# Altium PCB PCB1.PcbDoc (part 2 of 3)
Units mm, origin at the board's own origin, x right, y up, seen from the top; angles counter-clockwise.
Board outline 176 x 144.01 mm, 2 copper layers (Top Layer, Bottom Layer); 148 components, 189 nets, 767 pads, 256 vias.
Unrouted connection lines stored in the file: 30.
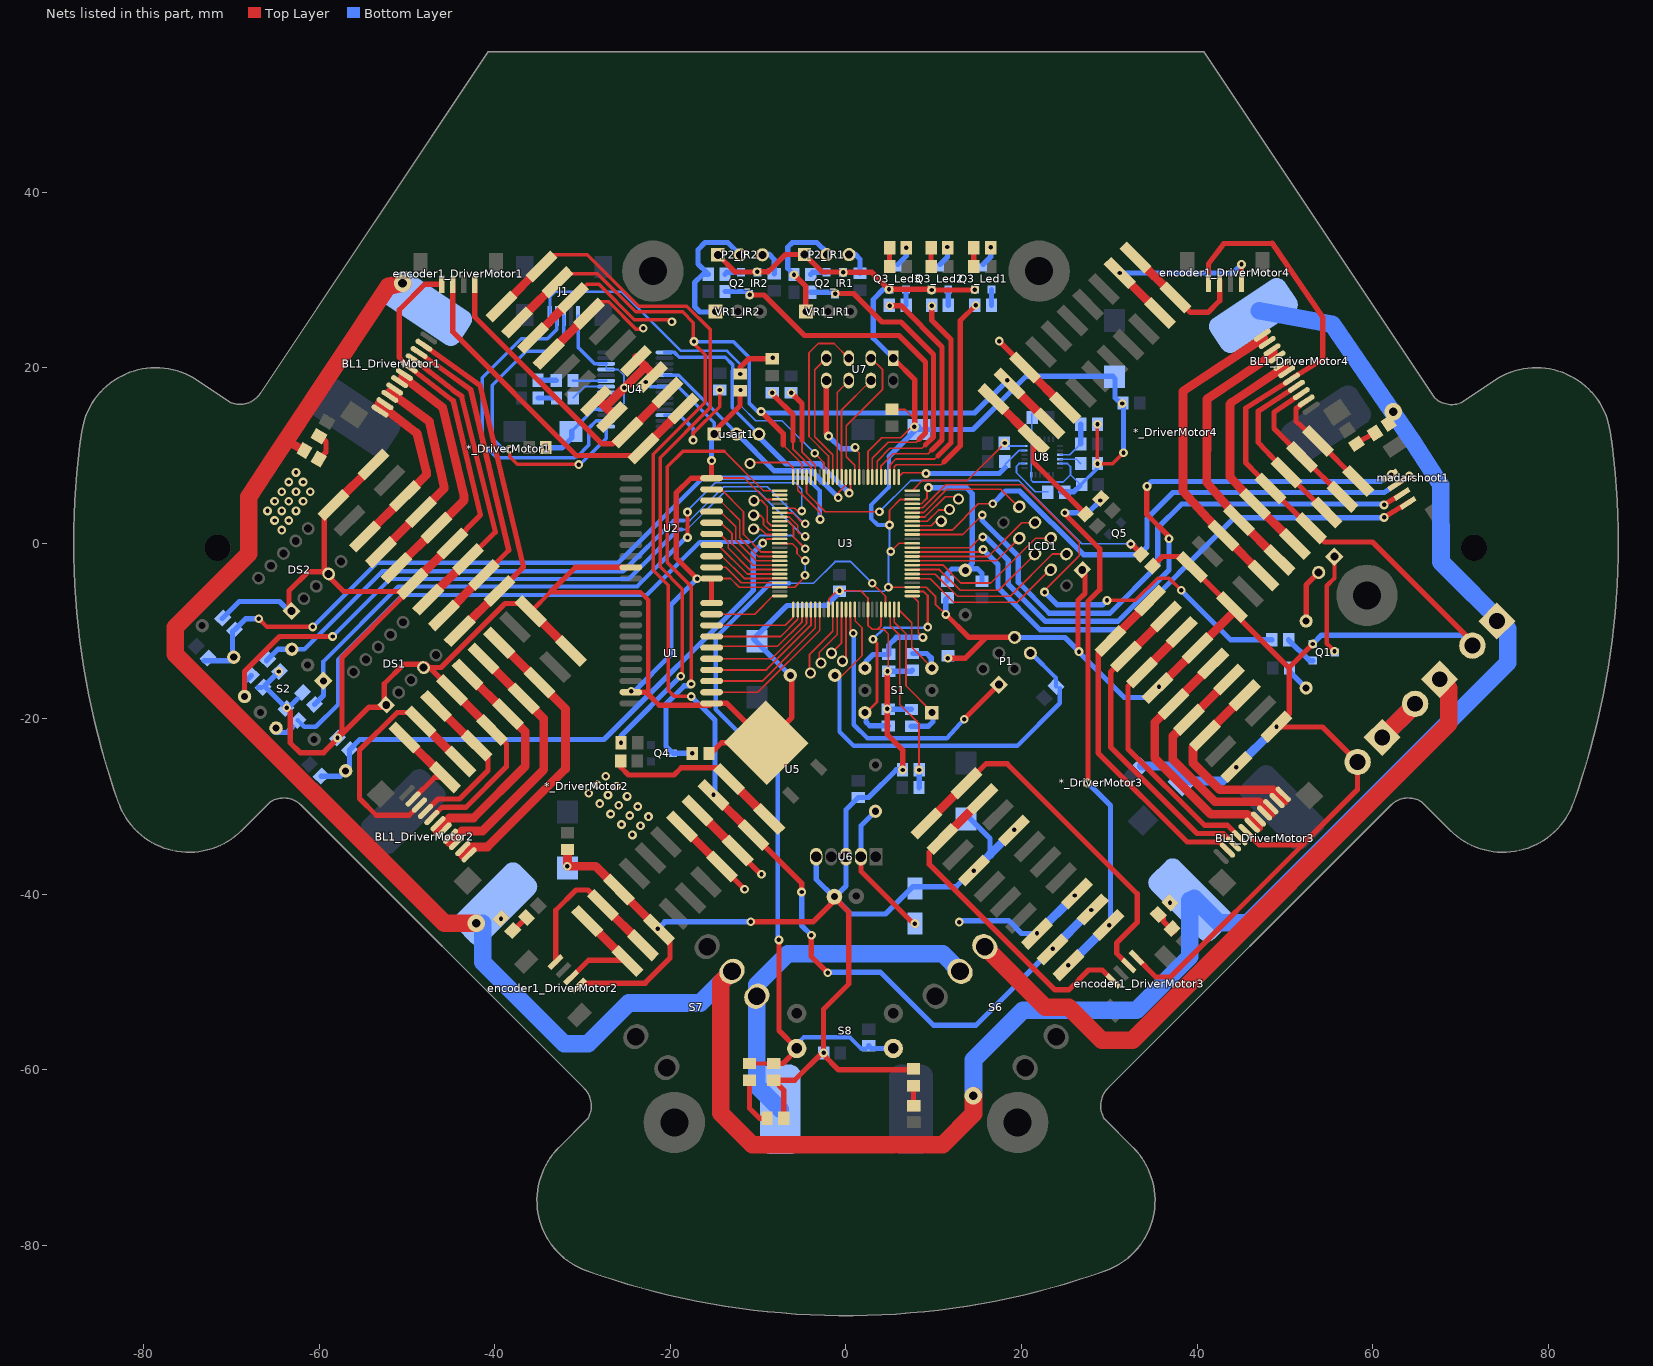
[diagram p2: the nets of this part, all layers, seen from the top]

## Via types
v1: diameter 1, hole 0.5, Top Layer to Bottom Layer, 225 vias
v2: diameter 2, hole 1, Top Layer to Bottom Layer, 17 vias
v3: diameter 1.27, hole 0.8, Top Layer to Bottom Layer, 12 vias
v4: diameter 1, hole 0.5, Top Layer to Bottom Layer, tented top, 1 vias
v5: diameter 1.27, hole 0.711, Top Layer to Bottom Layer, 1 vias

## Nets (pads, with @x,y where several pads share a name; then routed paths per layer and width w, separated by ;. In a path a pad name is that pad's centre, name@x,y a point inside that pad or via, vN(x,y) a via of type N, cw(c..) or ccw(c..) an arc to the next point about the centre after c; other vN are vias at no path point) (continued)
ADD0_DriverMotor1: *_DriverMotor1.7 *_DriverMotor1.8 *_DriverMotor1.11 *_DriverMotor1.16 *_DriverMotor2.8 *_DriverMotor2.11 *_DriverMotor2.16 *_DriverMotor3.7 *_DriverMotor3.11 *_DriverMotor3.16 *_DriverMotor4.11 *_DriverMotor4.16 Battery2.2 BL1_DriverMotor1.7 BL1_DriverMotor2.7 BL1_DriverMotor3.7 BL1_DriverMotor4.7 C4.1 C5.1 C6.2 C7.1 C8.2 C10.1 C11.1 C12.2 C13.1 C14.2 C15.2 C16.2 C17.2 C18.1 C19.1 C20.1 C21.2 C22.1 C23.1 C24.1 C25.2 C27.1 D6.1 D7.2 DS1.1 DS1.4 DS2.1 DS2.4 encoder1_DriverMotor1.1 encoder1_DriverMotor2.1 encoder1_DriverMotor3.1 encoder1_DriverMotor4.1 J1.5 kick1.2 LCD1.1 P1.6 P2_IR1.1 P2_IR2.1 Q1.3 Q2_IR1.3 Q2_IR2.3 Q3_Led1.3 Q3_Led2.3 Q3_Led3.3 R3.1 R4.1 R5.1 R6.1 R7.1 R8.1 R9.1 R10.1 R11.2 R12.2 R13.2 R17.1 R26.1 R28.1 R32.2 R35.1 R36.1 Reset1.1 U1.1 U1.10 U1.19 U2.1 U2.10 U2.19 U3.3 U3.13 U3.23 U3.33 U3.43 U3.53 U3.63 U3.73 U3.84 U3.93 U3.96 U4.7 U4.18 U4.21 U4.25 U4.26 U5.4 U6.3 U6.5 U7.1 U8.1 U8.11 U8.18 usart1.1 | length 1032.2
  Top Layer w0.2: U2.1@-15.314,-4.013 -13.157,-4.013 -12.17,-5 U3.73@-7.55,-5 -5.852,-5 v1@-4.674,-3.822 ; U2.10@-15.291,7.44 -11.605,7.44 -9.166,5 U3.53@-7.55,5 ; U3.63@-7.55,0 -7.5,-0.05 -6.097,-0.05 -5.588,-0.559 -5.588,-1.168 v1@-4.775,-1.981 ; v1(-4.674,-3.632) v1@-4.674,-3.531 ; v1@-3.581,10.236 v1(-3.569,10.249) -2.5,9.18 U3.43@-2.5,7.55 ; U3.84@-2,-7.55 -1.95,-7.5 -1.95,-6.35 -1.01,-5.41 v1(-0.737,-5.41) 1.676,-5.41 2.5,-6.234 U3.93@2.5,-7.55 2.5,-9.333 2.972,-9.804 3.581,-9.804 ; U3.33@2.5,7.55 2.5,10.45 4.064,12.014 6.223,12.014 7.849,13.64 7.849,14.122 6.721,15.25 C19.1@5.232,15.25 ; U3.96@4,-7.55 4,-9.386 3.581,-9.804 ; v1@4.826,-14.58 4.826,-10.338 4.293,-9.804 3.581,-9.804 ; v1(4.83,-5) U3.3@7.55,-5 9.14,-5 10.185,-6.045 10.185,-6.934 v1(11.354,-8.103) ; v1(4.953,2.083) 4.953,3.759 6.194,5 U3.23@7.55,5 ; v1(5.105,-0.94) 6.045,0 U3.13@7.55,0
  Top Layer w0.4: v1(28.653,13.555) v1(28.653,9.085) 30.395,9.085 v1@31.62,10.309
  Top Layer w0.5: *_DriverMotor2.11@-35.857,-7.757 -33.662,-5.563 -23.419,-5.563 -22.517,-6.464 -22.517,-17.209
  Top Layer w0.6: v1(-63.729,-18.745) -63.322,-19.152 -63.322,-22.733 -62.205,-23.851 -59.512,-23.851 -54.331,-18.669 -52.603,-18.669 -52.603,-16.002 -50.396,-13.795 DS1.4@-47.927,-13.795 ; DS2.1@-63.159,-7.623 -63.449,-7.333 -63.449,-5.41 -61.29,-3.251 DS2.4@-59.452,-3.251 ; *_DriverMotor1.11@-58.359,4.384 -58.359,4.226 -59.452,3.133 -59.452,-2.972 DS2.4@-58.942,-3.482 -58.942,-3.762 -57.22,-5.484 -50.267,-5.484 -50.267,-5.838 -57.429,-13.001 -57.429,-21.438 v1@-58.166,-22.174 ; *_DriverMotor1.11@-53.815,8.928 *_DriverMotor1.11@-53.815,8.971 ; BL1_DriverMotor1.7@-49.817,20.158 -50.902,21.184 -50.902,26.594 -47.969,29.526 encoder1_DriverMotor1.1@-46.046,29.526 ; BL1_DriverMotor1.7@-49.757,20.073 -44.771,16.209 ; DS1.4@-48.134,-14.163 -47.455,-14.163 *_DriverMotor2.16@-44.895,-16.722 ; DS1.4@-47.805,-13.795 -47.452,-14.148 -46.126,-14.148 -38.837,-6.858 -36.799,-6.858 -35.9,-7.757 *_DriverMotor2.11@-35.857,-7.757 ; BL1_DriverMotor2.7@-47.192,-31.249 -46.017,-30.074 -43.307,-30.074 -38.684,-25.451 -38.684,-22.89 *_DriverMotor2.16@-40.308,-21.266 ; *_DriverMotor1.16@-44.85,-0.024 -41.642,3.213 -44.755,16.231 ; *_DriverMotor1.16@-44.835,-0.052 *_DriverMotor1.16@-44.835,-0.009 ; -33.662,-5.563 -30.843,-2.743 U2.19@-24.514,-2.743 ; encoder1_DriverMotor2.1@-30.423,-50.372 -30.165,-50.114 -22.885,-50.114 -20.041,-47.269 -20.041,-45.302 -21.313,-44.03 *_DriverMotor2.8@-21.313,-44.004 ; U1.19@-24.514,-16.967 -22.758,-16.967 -22.517,-17.209 -21.276,-18.45 -15.526,-18.45 U1.1@-15.314,-18.237 -13.564,-18.237 U5.4@-9.055,-22.72 ; v1(-16.967,-4.039) -19.355,-1.651 -19.355,5.715 -17.653,7.417 U2.10@-15.314,7.417 -15.314,9.421 v1(-15.316,9.423) ; R36.1@-15.57,-24.105 -14.186,-22.72 U5.4@-9.055,-22.72 ; U1.10@-15.314,-6.807 U2.1@-15.314,-4.013 ; usart1.1@-15.291,12.446 -12.065,15.672 -12.065,16.754 C7.1@-11.684,17.135 ; P2_IR2.1@-14.605,32.868 -12.604,30.866 v1(-10.124,30.943) -8.834,30.943 -6.883,32.893 P2_IR1.1@-4.724,32.893 -2.749,30.943 v1(-0.32,30.866) 2.966,30.866 v1(4.902,28.931) 9.677,28.931 v1(9.754,28.854) 14.63,28.854 v1(14.681,28.905) ; v1(-10.846,-43.129) -10.846,-43.231 -10.795,-43.282 -10.643,-43.129 -3.759,-43.129 -1.321,-40.691 -1.321,-40.361 0.32,-42.001 0.32,-50.201 -2.565,-53.086 -2.565,-58.268 -0.838,-59.995 7.493,-59.995 R26.1@7.696,-59.792 ; D7.2@-7.102,-65.507 -7.102,-62.301 R35.1@-8.23,-61.173 -5.852,-61.173 v1@-2.565,-57.887 ; Reset1.1@-6.172,-15.088 -6.172,-19.837 U5.4@-9.055,-22.72 ; v1@4.826,-14.58 4.699,-14.707 v1(4.699,-18.872) 4.699,-21.793 6.452,-23.546 v1(6.452,-25.832) ; U7.1@5.385,21.082 7.849,18.618 7.849,13.64 v1@7.849,13.462 ; v1@11.367,-8.09 13.97,-10.693 15.999,-10.693 13.605,-13.087 v1(11.608,-13.087) ; 15.746,-10.717 P1.6@19.11,-10.717 ; v1(26.543,-12.344) 26.441,-12.243 26.441,-6.486 27.224,-5.703 LCD1.1@27.224,-3.455 ; v1(28.653,13.555) v1@28.661,13.564 ; encoder1_DriverMotor3.1@33.1,-47.213 35.291,-49.403 36.982,-49.403 52.045,-34.341 47.074,-34.341 BL1_DriverMotor3.7@45.574,-32.841 ; R17.1@34.991,-2.548 36.04,-1.499 38.178,-1.499 43.934,-7.254 43.977,-7.254 *_DriverMotor4.11@43.977,-7.706 ; encoder1_DriverMotor4.1@41.305,29.653 41.3,31.852 42.697,33.655 43.053,34.163 48.565,34.188 54.331,25.756 54.331,20.98 BL1_DriverMotor4.7@50.822,18.797 ; *_DriverMotor4.11@44.143,-7.872 50.462,-14.191 ; *_DriverMotor3.11@49.012,-20.92 50.495,-19.437 50.495,-14.158 v1(53.182,-11.471) ; *_DriverMotor3.11@49.047,-20.92 54.289,-20.92 Battery2.2@58.29,-24.92 58.29,-28.07 52.032,-34.328 ; BL1_DriverMotor4.7@50.764,18.713 45.542,15.392 45.542,9.22 48.37,6.27 52.914,1.726 52.957,1.726 54.531,0.152 59.969,0.152 71.371,-11.249 kick1.2@71.371,-11.662
  Top Layer w1: *_DriverMotor1.11@-58.359,4.384 *_DriverMotor1.11@-53.815,8.928 ; *_DriverMotor1.16@-50.267,-5.484 *_DriverMotor1.16@-44.835,-0.052 ; *_DriverMotor2.16@-44.895,-16.722 -44.852,-16.722 *_DriverMotor2.16@-40.308,-21.266 ; *_DriverMotor2.11@-35.857,-7.757 *_DriverMotor2.11@-31.313,-12.301 ; C20.1@-31.725,-34.884 -31.725,-36.779 v1(-31.75,-36.804) -28.513,-36.804 *_DriverMotor2.8@-25.885,-39.433 ; *_DriverMotor1.7@-28.136,16.289 -27.412,15.565 ; *_DriverMotor1.8@-26.668,14.821 -27.412,15.565 ; *_DriverMotor2.8@-25.87,-39.448 *_DriverMotor2.8@-21.313,-44.004 ; *_DriverMotor1.7@-23.895,21.187 -22.906,20.198 ; *_DriverMotor1.8@-22.099,19.391 -22.906,20.198 ; *_DriverMotor3.16@35.488,-16.527 *_DriverMotor4.11@44.143,-7.872 ; -27.412,15.565 -22.906,20.071 -22.906,20.198
  Bottom Layer w0.2: U4.18@-27.328,15.251 -25.973,15.251 -25.298,15.926 -25.298,19.126 -25.973,19.801 U4.25@-27.328,19.801 U4.26@-27.328,20.451 ; U4.21@-27.328,17.201 -25.903,17.201 v1@-25.298,17.805 ; v1@-25.298,17.78 -25.349,17.729 v1(-25.248,17.729) ; v1(-12.014,17.465) -12.014,15.697 -10.287,13.97 -7.29,13.97 v1(-3.569,10.249) ; v1(-4.674,-3.632) -4.648,-3.607 v1(-4.648,-1.956) ; C4.1@-0.737,-5.471 4.359,-5.471 v1(4.83,-5) 4.83,-1.215 v1(5.105,-0.94) 4.953,-0.787 v1(4.953,2.083) ; C15.2@21.19,14.71 21.177,14.697 21.177,11.93 U8.1@21.102,11.855 U8.18@21.102,7.805 21.102,7.193 21.311,6.985 24.742,6.985 25.578,7.821 ; U8.11@24.377,9.08 25.236,9.08 25.578,8.738 25.578,7.821 ; C27.1@26.753,6.646 25.578,7.821
  Bottom Layer w0.4: C6.2@-31.242,12.751 -28.742,15.251 U4.18@-27.328,15.251 ; J1.5@-30.531,25.895 -30.531,22.327 -28.655,20.451 U4.26@-27.328,20.451 ; v1(-22.822,18.377) -22.296,17.851 U4.7@-20.678,17.851 -19.121,17.851 -15.011,13.741 usart1.1@-15.011,12.446 ; C27.1@26.753,6.646 26.753,6.661 28.653,8.561 v1(28.653,9.085)
  Bottom Layer w0.5: 4.902,9.881 4.902,6.4 2.86,4.359 2.86,2.83 3.607,2.083 v1(4.953,2.083)
  Bottom Layer w0.6: R13.2@-71.068,-8.561 -69.136,-6.629 -64.559,-6.629 DS2.1@-63.312,-7.877 ; R8.1@-66.968,-16.42 R8.1@-66.613,-16.42 ; R8.1@-66.23,-16.319 -63.664,-18.886 -62.521,-17.743 ; R8.1@-66.204,-16.217 R9.1@-64.821,-14.834 ; v1@-34.138,10.871 -32.36,10.871 -31.242,11.988 C6.2@-31.242,12.751 ; v1(-24.46,-16.866) -24.13,-16.866 -19.964,-12.7 -19.964,-7.036 v1(-16.967,-4.039) ; v1(-21.427,-43.916) -20.641,-43.129 v1(-10.846,-43.129) ; v1(-15.316,9.423) -15.316,12.141 usart1.1@-15.011,12.446 ; Reset1.1@-6.071,-15.367 -10.541,-10.897 -6.731,-7.087 -2.21,-7.087 C4.1@-0.838,-5.715 ; U6.5@-3.4,-35.712 -3.4,-38.281 C8.2@-1.321,-40.361 ; R6.1@4.806,-18.915 7.428,-18.915 R3.1@7.446,-18.933 ; R4.1@4.878,-14.565 7.464,-14.565 R5.1@7.572,-14.457 ; 4.902,9.881 C14.2@8.331,13.31 ; Q3_Led3.3@4.948,28.914 4.225,28.914 3.099,27.788 3.099,23.368 U7.1@5.385,21.082 ; R28.1@6.441,-25.806 5.74,-25.806 2.581,-28.966 C18.1@1.397,-28.966 0,-30.363 U6.3@0,-35.712 0,-39.04 C8.2@-1.321,-40.361 ; C14.2@8.331,12.954 14.453,12.954 20.523,19.025 30.378,19.025 30.658,18.745 30.658,16.586 31.623,15.621 v1(31.623,10.312) ; v1(11.354,-8.103) 11.354,-6.402 R11.2@11.549,-6.207 ; C17.2@14.021,-31.242 16.408,-33.629 16.408,-35.458 ; v1(14.554,-37.313) 14.376,-37.313 12.566,-39.123 7.613,-39.123 4.496,-42.24 0.559,-42.24 C8.2@-1.321,-40.361 ; v1@19.177,-32.69 v1(19.177,-32.639) ; P1.6@19.364,-10.92 19.54,-10.744 24.943,-10.744 v1(26.543,-12.344) ; C22.1@24.436,5.884 25.991,5.884 C27.1@26.634,6.528 ; v1@26.467,-12.344 31.699,-17.577 34.417,-17.577 v1(35.662,-16.332) ; v1@49.047,-20.955 v1(49.047,-20.904) ; v1(53.182,-11.471) 54.188,-10.465 70.174,-10.465 kick1.2@71.371,-11.662
  Bottom Layer w1: v1(14.554,-37.313) 16.408,-35.458 v1@19.177,-32.69 ; C11.1@33.641,-25.363 36.671,-25.363 C12.2@38.382,-27.074 42.928,-27.074 v1(44.475,-25.527) v1@49.047,-20.955
  other v1: -2.55,-58.064 -24.333,-33.222 -23.418,-32.181 -25.578,-32.035 -22.503,-31.141 -24.65,-31.013 -26.822,-30.848 -23.723,-29.991 -25.883,-29.845 -28.067,-29.661 -24.943,-28.842 -27.115,-28.677 -29.312,-28.474 -26.163,-27.693 -28.347,-27.509 -27.383,-26.543 -57.937,-22.174 -64.618,-14.605 4.724,-14.58 -64.289,1.499 -65.101,2.595 -63.477,2.595 -65.913,3.691 -64.289,3.691 -62.665,3.691 -65.101,4.788 -63.477,4.788 -61.853,4.788 -64.289,5.884 -62.665,5.884 -61.042,5.884 -63.477,6.981 -61.853,6.981 -62.665,8.077 -34.204,10.897 7.798,13.259 31.471,15.926
BATTERY: F1_DriverMotor1.2 F1_DriverMotor2.2 F1_DriverMotor3.2 F1_DriverMotor4.2 kick1.1 R18_DriverMotor1.1 R18_DriverMotor2.1 R18_DriverMotor3.1 R18_DriverMotor4.1 S7.2 | length 336.7
  Top Layer w0.6: -65.133,9.699 -63.917,10.914
  Top Layer w1: -63.774,11.748 R18_DriverMotor1.1@-61.707,10.559
  Top Layer w2: v2(-50.521,29.616) -52.153,29.285 -63.774,11.748 -65.133,9.699 -68.055,5.288 -68.055,-1.203 -76.403,-9.55 -76.403,-12.624 -45.745,-43.282 v2(-42.139,-43.282) ; S7.2@-12.987,-48.775 -14.249,-50.038 -14.249,-64.948 -10.693,-68.504 11.024,-68.504 14.529,-64.999 v2@14.529,-62.941
  Bottom Layer w2: F1_DriverMotor2.2@-41.377,-43.282 -41.377,-47.734 -32.109,-57.001 -29.391,-57.001 -24.765,-52.375 -16.586,-52.375 S7.2@-12.987,-48.775 ; v2(14.503,-62.941) 14.529,-62.916 14.529,-58.826 20.168,-53.188 33.096,-53.188 39.186,-47.098 F1_DriverMotor3.2@39.186,-40.646 ; F1_DriverMotor3.2@39.669,-40.443 42.457,-43.231 45.796,-43.231 75.413,-13.614 75.413,-9.754 67.793,-2.134 67.755,6.656 64.574,11.608 55.41,24.948 F1_DriverMotor4.2@47.083,26.493
  other v1: -39.305,-42.762 36.918,-40.959
  other v2: 62.357,14.986
BUZ: R1.1 U3.21 | length 60.8
  Top Layer w0.2: U3.21@7.55,4 7.6,4.05 8.724,4.05 11.354,6.68 20.015,6.68 26.568,0.127 26.568,-1.422 22.631,-5.359 v1(22.631,-5.563)
  Top Layer w0.4: v1(29.743,-6.502) 32.969,-6.502 35.509,-3.962 36.805,-3.962 v1(38.202,-5.359)
  Bottom Layer w0.6: v1(22.631,-5.563) 24.079,-7.01 29.235,-7.01 v1(29.743,-6.502) ; v1(38.202,-5.359) 43.84,-10.998 R1.1@48.529,-10.998
CE: U3.36 U7.3 | length 16.2
  Top Layer w0.2: U3.36@1,7.55 1,8.881 0.025,9.855 0.025,13.411 4.166,17.551 4.166,19.761 U7.3@2.845,21.082
CSN: U3.39 U7.4 | length 12.4
  Top Layer w0.2: U3.39@-0.5,7.55 -0.5,15.197 U7.4@2.845,18.542
DISCHARGE: madarshoot1.4 U3.11 | length 67.8
  Top Layer w0.2: U3.11@7.55,-1 15.332,-1 v1(15.621,-0.711)
  Top Layer w0.6: v1@61.433,3.003 madarshoot1.4@64.218,4.72
  Bottom Layer w0.6: v1(15.621,-0.711) 17.316,-2.406 17.316,-5.048 22.123,-9.855 31.496,-9.855 44.272,2.921 v1@61.305,2.921
  other v1: 61.305,2.946
DM: J1.2 U4.16 | length 37.4
  Bottom Layer w0.4: J1.2@-32.931,25.895 -32.931,24.371 -34.011,23.292 -36.982,23.292 -41.427,18.847 -41.427,11.405 -39.776,9.754 -30.94,9.754 -30.827,9.866 -30.621,9.866 -29.337,11.151 -29.337,13.081 -28.467,13.951 U4.16@-27.328,13.951
DP: J1.3 U4.15 | length 36.7
  Top Layer w0.4: v1(-38.329,10.719) -38.329,9.855 -37.465,8.992 -30.48,8.992 v1@-30.251,8.763 ; v1(-30.455,8.966) -30.455,8.915 -30.429,8.89 v1@-30.378,8.89
  Bottom Layer w0.4: v1(-38.329,10.719) -38.329,10.668 -38.989,10.668 -40.31,11.989 -40.31,18.009 -36.449,21.869 -33.985,21.869 -32.131,23.724 J1.3@-32.131,25.895 ; v1(-30.455,8.966) -30.455,8.915 -30.429,8.89 -30.378,8.89 -27.328,11.94 U4.15@-27.328,13.301
ENC1_DriverMotor1: *_DriverMotor1.10 encoder1_DriverMotor1.2 | length 40
  Top Layer w0.6: encoder1_DriverMotor1.2@-44.796,29.526 -44.796,24.069 -30.734,10.008 *_DriverMotor1.10@-24.603,10.008 ; *_DriverMotor1.10@-24.45,9.855 *_DriverMotor1.10@-24.603,10.008 ; *_DriverMotor1.10@-23.076,10.823 -23.891,10.008 *_DriverMotor1.10@-24.603,10.008
  Top Layer w1: *_DriverMotor1.10@-23.076,10.823 *_DriverMotor1.10@-18.507,15.392
ENC1_DriverMotor2: *_DriverMotor2.10 encoder1_DriverMotor2.2 | length 13.4
  Top Layer w0.6: encoder1_DriverMotor2.2@-31.307,-49.489 -29.326,-47.508 -25.019,-47.508 *_DriverMotor2.10@-25.019,-47.482
  Top Layer w1: *_DriverMotor2.10@-29.462,-43.04 *_DriverMotor2.10@-25.019,-47.482
ENC1_DriverMotor3: *_DriverMotor3.10 encoder1_DriverMotor3.2 | length 42.7
  Top Layer w0.6: *_DriverMotor3.10@13.729,-27.358 15.967,-25.121 18.364,-25.121 33.172,-39.929 33.172,-43.205 30.836,-45.542 30.836,-46.716 encoder1_DriverMotor3.2@32.217,-48.097
  Top Layer w1: *_DriverMotor3.10@9.16,-31.927 *_DriverMotor3.10@13.729,-27.358
ENC1_DriverMotor4: *_DriverMotor4.10 encoder1_DriverMotor4.2 | length 15
  Top Layer w0.6: *_DriverMotor4.10@37.539,28.029 39.253,26.314 41.25,26.314 42.57,27.635 encoder1_DriverMotor4.2@42.57,29.921
  Top Layer w1: *_DriverMotor4.10@32.97,32.598 *_DriverMotor4.10@37.539,28.029
ENC2_DriverMotor1: *_DriverMotor1.9 encoder1_DriverMotor1.4 | length 34.3
  Top Layer w0.6: encoder1_DriverMotor1.4@-42.296,29.526 -42.296,25.786 -27.864,11.354 -26.544,11.354 *_DriverMotor1.9@-24.872,13.025
  Top Layer w1: *_DriverMotor1.9@-24.872,12.619 *_DriverMotor1.9@-20.303,17.188
ENC2_DriverMotor2: *_DriverMotor2.9 encoder1_DriverMotor2.4 | length 19.3
  Top Layer w0.6: encoder1_DriverMotor2.4@-33.075,-47.721 -33.075,-41.813 -30.759,-39.497 -29.413,-39.497 *_DriverMotor2.9@-27.681,-41.229
  Top Layer w1: *_DriverMotor2.9@-27.681,-41.229 -23.223,-45.686 *_DriverMotor2.9@-23.223,-45.712
ENC2_DriverMotor3: *_DriverMotor3.9 encoder1_DriverMotor3.4 | length 38.2
  Top Layer w0.6: *_DriverMotor3.9@10.956,-33.723 9.5,-35.18 9.5,-36.576 23.8,-50.876 25.375,-50.876 27.635,-48.616 29.2,-48.616 encoder1_DriverMotor3.4@30.449,-49.865
  Top Layer w1: *_DriverMotor3.9@10.956,-33.723 *_DriverMotor3.9@15.525,-29.154
ENC2_DriverMotor4: *_DriverMotor4.9 encoder1_DriverMotor4.4 | length 22.9
  Top Layer w0.6: encoder1_DriverMotor4.4@45.055,29.653 45.055,31.684 45.036,31.702 45.06,31.726 v1(45.06,31.775)
  Top Layer w1: v1(31.174,30.802) *_DriverMotor4.9@35.743,26.233
  Bottom Layer w0.6: v1(31.174,30.802) 44.086,30.802 v1(45.06,31.775)
HALL1_DriverMotor1: *_DriverMotor1.18 BL1_DriverMotor1.9 | length 36.5
  Top Layer w0.6: BL1_DriverMotor1.9@-48.647,21.737 -42.749,17.504 ; -42.757,17.493 -38.43,-0.788 -41.698,-4.056 *_DriverMotor1.18@-41.698,-4.099
  Top Layer w1: *_DriverMotor1.18@-45.787,-8.188 *_DriverMotor1.18@-41.698,-4.099
HALL1_DriverMotor2: *_DriverMotor2.18 BL1_DriverMotor2.9 | length 29.1
  Top Layer w0.5: -49.759,-30.988 BL1_DriverMotor2.9@-48.606,-29.835
  Top Layer w0.6: -49.759,-30.988 -53.518,-30.988 -55.423,-29.083 -55.423,-23.571 -51.13,-19.279 *_DriverMotor2.18@-49.549,-19.279 ; *_DriverMotor2.18@-44.055,-24.772 *_DriverMotor2.18@-44.012,-24.772
  Top Layer w1: *_DriverMotor2.18@-49.549,-19.279 *_DriverMotor2.18@-44.055,-24.772
HALL1_DriverMotor3: *_DriverMotor3.18 BL1_DriverMotor3.9 | length 36.1
  Top Layer w0.6: *_DriverMotor3.18@31.896,-12.935 30.15,-14.68 30.15,-23.216 40.005,-33.071 42.976,-33.071 BL1_DriverMotor3.9@44.16,-34.255 ; *_DriverMotor3.18@36.44,-8.391 *_DriverMotor3.18@36.44,-8.347
  Top Layer w1: *_DriverMotor3.18@31.896,-12.935 *_DriverMotor3.18@36.44,-8.391
HALL1_DriverMotor4: *_DriverMotor4.18 BL1_DriverMotor4.9 | length 16.6
  Top Layer w0.6: BL1_DriverMotor4.9@51.874,17.049 48.754,14.949 48.754,13.07 51.962,9.862 52.006,9.862 *_DriverMotor4.18@56.55,5.318
HALL2_DriverMotor1: *_DriverMotor1.17 BL1_DriverMotor1.8 | length 33.6
  Top Layer w0.6: BL1_DriverMotor1.8@-49.202,20.905 -44.681,17.401 -44.679,17.399 ; -44.698,17.379 -43.79,16.739 -39.954,1.27 -40.411,0.823 -43.039,-1.805 *_DriverMotor1.17@-43.039,-1.848
  Top Layer w1: *_DriverMotor1.17@-47.583,-6.392 *_DriverMotor1.17@-43.039,-1.848
HALL2_DriverMotor2: *_DriverMotor2.17 BL1_DriverMotor2.8 | length 18.8
  Top Layer w0.6: BL1_DriverMotor2.8@-47.899,-30.542 -46.491,-29.134 -44.044,-29.134 -40.792,-25.883 -40.792,-24.4 *_DriverMotor2.17@-42.216,-22.976
  Top Layer w1: *_DriverMotor2.17@-46.676,-18.533 -42.234,-22.976 *_DriverMotor2.17@-42.216,-22.976
HALL2_DriverMotor3: *_DriverMotor3.17 BL1_DriverMotor3.8 | length 32.7
  Top Layer w0.6: *_DriverMotor3.17@33.692,-14.731 32.131,-16.291 32.131,-23.419 40.843,-32.131 43.45,-32.131 BL1_DriverMotor3.8@44.867,-33.548 ; *_DriverMotor3.17@38.236,-10.187 *_DriverMotor3.17@38.236,-10.143
  Top Layer w1: *_DriverMotor3.17@33.692,-14.731 *_DriverMotor3.17@38.236,-10.187
HALL2_DriverMotor4: *_DriverMotor4.17 BL1_DriverMotor4.8 | length 19.9
  Top Layer w0.6: BL1_DriverMotor4.8@51.319,17.881 46.965,15.037 46.965,11.506 50.166,8.066 54.71,3.522 *_DriverMotor4.17@54.754,3.522
HALL3_DriverMotor1: *_DriverMotor1.19 BL1_DriverMotor1.10 | length 39.4
  Top Layer w0.6: BL1_DriverMotor1.10@-48.093,22.569 -41.717,18.02 ; -41.707,18.034 -36.735,-2.685 -39.44,-5.39 *_DriverMotor1.19@-39.44,-5.434
  Top Layer w1: *_DriverMotor1.19@-43.991,-9.984 *_DriverMotor1.19@-39.44,-5.434
HALL3_DriverMotor2: *_DriverMotor2.19 BL1_DriverMotor2.10 | length 11.1
  Top Layer w0.6: BL1_DriverMotor2.10@-49.313,-29.127 -46.855,-26.669 -45.724,-26.669 *_DriverMotor2.19@-45.681,-26.669
  Top Layer w1: *_DriverMotor2.19@-50.268,-22.125 *_DriverMotor2.19@-45.724,-26.669
HALL3_DriverMotor3: *_DriverMotor3.19 BL1_DriverMotor3.10 | length 39.1
  Top Layer w0.6: *_DriverMotor3.19@30.1,-11.139 28.727,-12.511 28.727,-23.876 38.887,-34.036 42.527,-34.036 BL1_DriverMotor3.10@43.453,-34.962 ; *_DriverMotor3.19@34.644,-6.595 *_DriverMotor3.19@34.644,-6.551
  Top Layer w1: *_DriverMotor3.19@30.1,-11.139 *_DriverMotor3.19@34.644,-6.595
HALL3_DriverMotor4: *_DriverMotor4.19 BL1_DriverMotor4.10 | length 12.7
  Top Layer w0.6: BL1_DriverMotor4.10@52.428,16.217 51.259,15.347 51.283,13.894 53.758,11.658 58.302,7.114 *_DriverMotor4.19@58.346,7.114
ID0: R3.2 S1.1 U3.99 | length 17.3
  Top Layer w0.2: U3.99@5.5,-7.55 5.5,-8.98 6.833,-10.312 6.833,-16.244 S1.1@9.9,-19.311
  Bottom Layer w0.6: R3.2@7.446,-20.833 9.393,-20.833 9.9,-20.326 S1.1@9.9,-19.311
ID1: R4.2 S1.4 U3.1 | length 14.2
  Top Layer w0.2: U3.1@7.55,-6 8.23,-6.68 8.23,-10.185 v1(8.763,-10.719)
  Bottom Layer w0.6: S1.4@2.28,-14.231 2.28,-13.468 3.083,-12.665 R4.2@4.878,-12.665 4.878,-11.581 5.74,-10.719 v1(8.763,-10.719)
ID2: R5.2 S1.3 U3.100 | length 12.1
  Top Layer w0.2: U3.100@6,-7.55 7.493,-9.043 7.493,-11.862 S1.3@10.033,-14.402
  Bottom Layer w0.6: R5.2@7.572,-12.557 9.204,-12.557 9.703,-13.056 9.703,-14.034 S1.3@9.9,-14.231
ID3: R6.2 S1.6 U3.2 | length 25.2
  Top Layer w0.2: U3.2@7.55,-5.5 8.853,-5.5 9.322,-5.969
  Top Layer w0.3: S1.6@2.28,-19.311 3.531,-18.06 3.531,-11.379 v1(3.073,-10.922) ; v1(9.322,-9.55) 9.322,-5.969
  Bottom Layer w0.3: v1(3.073,-10.922) 4.369,-9.627 9.246,-9.627 v1(9.322,-9.55)
  Bottom Layer w0.6: S1.6@2.28,-19.311 2.28,-20.364 2.7,-20.785 4.776,-20.785 R6.2@4.806,-20.815
IR1: Q2_IR1.1 R23_IR1.2 U3.31 | length 35.4
  Top Layer w0.2: U3.31@3.5,7.55 3.55,7.6 3.55,9.367 5.004,10.82 8.661,10.82 9.068,11.227
  Top Layer w0.6: v1(-1.219,28.448) 0.872,28.448 4.098,25.222 6.248,25.222 9.957,21.514 9.957,12.116 9.068,11.227
  Bottom Layer w0.6: R23_IR1.2@-4.028,28.6 Q2_IR1.1@-1.504,28.6 ; Q2_IR1.1@-1.285,28.382 Q2_IR1.1@-1.27,28.366
IR2: Q2_IR2.1 R23_IR2.2 U3.32 | length 43.6
  Top Layer w0.2: U3.32@3,7.55 3,9.706 4.801,11.506 8.001,11.506 8.319,11.824
  Top Layer w0.6: v1(-10.973,28.296) -9.347,28.296 -4.724,23.673 6.045,23.673 9.068,20.65 9.068,12.573 8.319,11.824
  Bottom Layer w0.6: R23_IR2.2@-13.782,28.677 -11.334,28.677 Q2_IR2.1@-11.024,28.366
IRQ: U3.35 U7.8 | length 13.4
  Top Layer w0.2: v1(1.041,10.922) 1.041,10.744 1.5,10.286 U3.35@1.5,7.55
  Top Layer w0.6: U7.8@-2.235,18.542 -2.235,12.471 v1(-1.981,12.217)
  Bottom Layer w0.6: v1(-1.981,12.217) -0.533,10.77 v1@0.787,10.77
K0: C1.1 R11.1 S3.1 U3.22 | length 23.7
  Top Layer w0.2: U3.22@7.55,4.5 8.608,4.5 9.22,5.112 9.22,6.172 v1(9.398,6.35)
  Bottom Layer w0.6: v1@9.423,6.325 13.736,6.325 14.376,5.684 14.376,-2.311 S3.1@13.589,-3.099 ; R11.1@11.549,-4.307 11.549,-3.437 12.053,-2.933 13.632,-2.933 13.669,-2.896 14.986,-2.896 15.502,-3.412 C1.1@15.502,-4.336
K1: C2.1 R12.1 S4.1 U3.62 | length 67.8
  Top Layer w0.2: U3.62@-7.55,0.5 -9,0.5 v1(-9.474,0.025) ; v1(-9.474,0.025) -9.347,-0.102 -9.322,-0.102 -9.22,-0.203 -9.246,-0.203 v1(-9.474,0.025)
  Bottom Layer w0.6: C2.1@-59.78,-26.529 -57.608,-26.529 S4.1@-57.005,-25.926 -56.58,-25.501 R12.1@-56.58,-23.532 -55.4,-22.352 -27.559,-22.352 -10.566,-5.359 -10.566,-1.067 v1(-9.474,0.025)
K2: C3.1 R13.1 S5.1 U3.49 | length 91
  Top Layer w0.2: U3.49@-5.5,7.55 -5.5,6.033 -2.946,3.48 v1(-2.946,2.718)
  Top Layer w0.5: v1(-66.904,-8.585) -65.964,-9.525 v1(-60.757,-9.525)
  Bottom Layer w0.5: v1(-60.757,-9.525) -53.442,-2.21 -25.959,-2.21 -16.281,7.468 -4.47,7.468 -2.972,5.969 v1@-2.972,2.692
  Bottom Layer w0.6: C3.1@-73.152,-13.397 -70.181,-13.397 -69.901,-13.117 R13.1@-69.901,-9.982 ; R13.1@-69.672,-9.881 -68.377,-8.585 v1(-66.904,-8.585)
KICKD0: madarshoot1.2 U3.16 | length 68.5
  Top Layer w0.2: U3.16@7.55,1.5 12.092,1.5 15.088,4.496 v1(16.713,4.496) ; v1@16.713,4.47 v1@16.739,4.47
  Top Layer w0.6: madarshoot1.2@62.831,6.8 v1(64.186,7.671)
  Bottom Layer w0.6: v1(16.713,4.496) 18.186,5.969 19.787,5.969 27.051,-1.295 33.401,-1.295 34.29,-0.406 34.29,2.845 37.236,5.791 61.366,5.791 v1(64.186,7.671)
KICKD1: madarshoot1.3 U3.15 | length 72
  Top Layer w0.2: U3.15@7.55,1 13.294,1 v1(15.519,3.226) v1@15.519,2.87 ; v1@15.507,2.883 v1@15.519,2.896
  Top Layer w0.6: v1(61.305,4.375) madarshoot1.3@63.524,5.76
  Bottom Layer w0.6: v1(15.519,3.226) 15.519,2.591 19.634,-1.524 19.634,-4.445 23.165,-7.976 30.074,-7.976 35.509,-2.54 35.509,1.727 38.252,4.47 v1@61.214,4.47
LCDD4: LCD1.6 U3.7 | length 16.6
  Top Layer w0.2: U3.7@7.671,-2.997 10.643,-2.997 13.005,-5.359 17.399,-5.359 21.43,-1.328 LCD1.6@21.633,-1.328
LCDD5: LCD1.7 U3.10 | length 15.6
  Top Layer w0.2: U3.10@7.55,-1.471 7.59,-1.511 16.193,-1.511 20.041,2.337 LCD1.7@21.532,2.337
LCDD6: LCD1.8 U3.9 | length 13.2
  Top Layer w0.2: U3.9@7.55,-2 17.152,-2 LCD1.8@19.728,0.577
LCDD7: LCD1.9 U3.20 | length 14.1
  Top Layer w0.2: U3.20@7.55,3.5 8.834,3.5 11.481,6.147 17.623,6.147 LCD1.9@19.672,4.098
LCDEN: LCD1.5 U3.8 | length 18.6
  Top Layer w0.2: U3.8@7.595,-2.464 11.024,-2.464 13.081,-4.521 16.485,-4.521 21.59,0.584 LCD1.5@23.186,0.584
LCDRS: LCD1.3 U3.6 | length 20.7
  Top Layer w0.2: U3.6@7.696,-3.531 10.185,-3.531 12.7,-6.045 18.694,-6.045 23.52,-1.219 24.989,-1.219 LCD1.3@25.218,-1.448
LCDRW: LCD1.4 U3.5 | length 18.4
  Top Layer w0.2: U3.5@7.55,-4 7.6,-4.05 9.587,-4.05 12.243,-6.706 19.533,-6.706 LCD1.4@23.271,-2.967
LED1: R24_Led1.1 U3.27 | length 26.4
  Top Layer w0.2: U3.27@5.5,7.55 5.5,8.7 5.739,8.94 10.845,8.94 11.176,9.271
  Top Layer w0.6: 11.176,9.271 13.005,11.1 13.005,25.349 v1(14.783,27.127)
LED2: R24_Led2.1 U3.28 | length 25.9
  Top Layer w0.2: U3.28@5,7.55 5,8.912 5.69,9.601 10.109,9.601 10.477,9.97
  Top Layer w0.6: v1(9.779,27.051) 9.779,25.4 11.963,23.216 11.963,11.455 10.477,9.97
LED3: R24_Led3.1 U3.30 | length 28
  Top Layer w0.2: U3.30@4,7.55 4,8.851 5.359,10.211 9.373,10.211 9.779,10.617
  Top Layer w0.6: v1(4.978,27.076) 6.248,27.076 10.947,22.377 10.947,11.786 9.779,10.617
MENU0: R10.2 S2.6 U3.58 | length 78.4
  Top Layer w0.2: U3.58@-7.55,2.5 -6.539,2.5 -5.994,1.956 -5.994,0.737 v1(-4.648,-0.61)
  Bottom Layer w0.2: -11.151,0.152 -10.566,0.152 -9.83,0.889 -6.147,0.889 v1(-4.648,-0.61)
  Bottom Layer w0.5: R10.2@-62.447,-20.179 -61.711,-20.916 -60.413,-20.916 -57.861,-18.364 -57.861,-13.259 -50.495,-5.893 -22.708,-5.893 -16.662,0.152 -11.151,0.152
  Bottom Layer w0.6: S2.6@-65.389,-21.127 -64.957,-21.559 -63.7,-21.559 -63.057,-20.916
MENU1: R9.2 S2.3 U3.56 | length 74.7
  Top Layer w0.2: U3.56@-7.55,3.5 -7.504,3.454 -6.096,3.454 -4.877,2.235 v1(-4.648,2.235)
  Bottom Layer w0.2: -18.517,2.591 -17.78,2.591 -13.919,6.452 -8.992,6.452 v1@-4.712,2.172
  Bottom Layer w0.5: S2.3@-63.135,-12.071 -61.702,-12.071 -52.807,-3.175 -25.375,-3.175 -19.609,2.591 -18.517,2.591
  Bottom Layer w0.6: R9.2@-66.026,-13.374 -64.722,-12.071 S2.3@-63.135,-12.071
MENU2: R8.2 S2.4 U3.57 | length 84.3
  Top Layer w0.2: U3.57@-7.55,3 -6.454,3 -5.486,2.032 -5.486,1.321 -4.953,0.787 v1(-4.648,0.787)
  Top Layer w0.6: S2.4@-68.524,-17.459 -68.524,-14.599 -64.541,-10.617 v1(-58.496,-10.617)
  Bottom Layer w0.2: -18.694,1.575 -18.11,1.575 -13.767,5.918 -10.008,5.918 v1@-4.763,0.673
  Bottom Layer w0.5: v1(-58.496,-10.617) -51.943,-4.064 -24.74,-4.064 -19.101,1.575 -18.694,1.575
  Bottom Layer w0.6: S2.4@-68.524,-17.459 -68.524,-15.821 R8.2@-67.753,-15.051
MENU3: R7.2 S2.1 U3.55 | length 76
  Top Layer w0.2: U3.55@-7.55,4 -5.829,4 -5.436,3.607 -5.359,3.683 v1(-5.029,3.683)
  Top Layer w0.5: v1@-18.059,0.559 -18.059,3.378 -18.237,3.556 v1@-17.932,3.556
  Bottom Layer w0.2: v1@-17.932,3.556 -18.237,3.556 -14.884,6.909 -5.791,6.909 -5.029,6.147 v1(-5.029,3.683)
  Bottom Layer w0.5: S2.1@-59.543,-15.663 -59.543,-13.468 -51.003,-4.928 -23.8,-4.928 v1@-18.415,0.457
  Bottom Layer w0.6: R7.2@-60.568,-18.35 -59.543,-17.326 S2.1@-59.543,-15.663
  other v1: -18.059,0.66 -18.059,3.556
MISO: U3.41 U7.7 | length 14.9
  Top Layer w0.2: U7.7@-2.235,21.082 -3.556,19.761 -3.556,12.141 -1.5,10.085 U3.41@-1.5,7.55
MOSI: U3.40 U7.6 | length 11.5
  Top Layer w0.2: U3.40@-1,7.55 -1,17.186 0.305,18.491 U7.6@0.305,18.542
MW1_DriverMotor1: *_DriverMotor1.13 BL1_DriverMotor1.1 BL1_DriverMotor1.2 | length 20.1
  Top Layer w1: *_DriverMotor1.13@-54.767,0.792 -54.767,0.835 -50.223,5.379 -47.803,7.8 -47.803,8.204 -48.876,12.527 ; -53.208,15.884 -48.997,12.624 ; BL1_DriverMotor1.1@-52.974,15.264 BL1_DriverMotor1.1@-52.954,15.249
MW1_DriverMotor2: *_DriverMotor2.13 BL1_DriverMotor2.1 BL1_DriverMotor2.2 | length 33.9
  Top Layer w1: -43.637,-35.56 -43.03,-34.953 ; BL1_DriverMotor2.2@-43.487,-34.953 -43.03,-34.953 ; *_DriverMotor2.13@-39.492,-11.349 -39.449,-11.349 *_DriverMotor2.13@-34.905,-15.893 ; *_DriverMotor2.13@-35.032,-15.792 -31.953,-18.87 -31.953,-25.705 -40.856,-34.608 -42.685,-34.608 -43.03,-34.953
MW1_DriverMotor3: *_DriverMotor3.13 BL1_DriverMotor3.1 BL1_DriverMotor3.2 | length 22.6
  Top Layer w1: *_DriverMotor3.13@40.824,-21.965 39.548,-23.241 39.548,-25.044 42.596,-28.092 48.692,-28.092 49.507,-28.908 ; *_DriverMotor3.13@40.876,-21.915 40.876,-21.872 *_DriverMotor3.13@45.42,-17.328 ; BL1_DriverMotor3.2@49.291,-29.124 49.507,-28.908 ; 49.987,-29.388 49.507,-28.908
MW1_DriverMotor4: *_DriverMotor4.13 BL1_DriverMotor4.1 BL1_DriverMotor4.2 | length 35.7
  Top Layer w1: *_DriverMotor4.13@47.569,-3.662 43.025,0.882 42.982,0.882 38.405,5.918 38.405,17.329 38.453,17.378 38.464,17.385 47.6,23.419
MW2_DriverMotor1: *_DriverMotor1.14 BL1_DriverMotor1.3 BL1_DriverMotor1.4 | length 23.4
  Top Layer w1: *_DriverMotor1.14@-52.971,-1.004 -52.971,-0.961 -48.427,3.583 -45.796,6.214 -45.796,6.401 -47.422,13.614 ; -51.976,17.236 -47.422,13.843
MW2_DriverMotor2: *_DriverMotor2.14 BL1_DriverMotor2.3 BL1_DriverMotor2.4 | length 29.5
  Top Layer w1: -45.187,-34.087 -45.06,-34.087 -43.739,-32.766 -41.402,-32.766 -34.442,-25.806 -34.442,-19.973 *_DriverMotor2.14@-36.714,-17.702 ; *_DriverMotor2.14@-41.288,-13.145 -36.846,-17.588 *_DriverMotor2.14@-36.828,-17.588
MW2_DriverMotor3: *_DriverMotor3.14 BL1_DriverMotor3.3 BL1_DriverMotor3.4 | length 25.7
  Top Layer w1: *_DriverMotor3.14@39.033,-20.174 37.236,-21.971 37.236,-24.638 42.037,-29.439 47.066,-29.439 47.869,-30.241 ; *_DriverMotor3.14@39.08,-20.119 43.624,-15.575 *_DriverMotor3.14@43.624,-15.532 ; BL1_DriverMotor3.4@47.869,-30.546 47.869,-30.241 ; 48.438,-30.81 47.869,-30.241
MW2_DriverMotor4: *_DriverMotor4.14 BL1_DriverMotor4.3 BL1_DriverMotor4.4 | length 30.7
  Top Layer w1: BL1_DriverMotor4.3@48.675,21.842 BL1_DriverMotor4.3@48.678,21.843 ; 48.717,21.539 41.276,16.536 41.164,16.462 41.115,16.413 41.115,13.97 41.097,6.934 44.778,2.678 49.322,-1.866 *_DriverMotor4.14@49.365,-1.866
MW3_DriverMotor1: *_DriverMotor1.15 BL1_DriverMotor1.5 BL1_DriverMotor1.6 | length 27.5
  Top Layer w1: *_DriverMotor1.15@-51.175,-2.8 -51.175,-2.757 -46.631,1.787 -43.51,4.908 -43.51,5.309 -45.949,15.469 -50.44,18.957 -50.495,18.999
MW3_DriverMotor2: *_DriverMotor2.15 BL1_DriverMotor2.5 BL1_DriverMotor2.6 | length 26.6
  Top Layer w1: -46.609,-32.741 -45.964,-32.096 ; BL1_DriverMotor2.6@-46.345,-32.096 -45.964,-32.096 ; -45.812,-32.096 -45.964,-32.096 ; *_DriverMotor2.15@-43.084,-14.941 -38.642,-19.384 *_DriverMotor2.15@-38.624,-19.384 ; *_DriverMotor2.15@-38.51,-19.498 -36.551,-21.457 -36.551,-25.4 -42.443,-31.293 -45.161,-31.293 -45.964,-32.096
MW3_DriverMotor3: *_DriverMotor3.15 BL1_DriverMotor3.5 BL1_DriverMotor3.6 | length 29.5
  Top Layer w1: *_DriverMotor3.15@36.846,-18.754 35.188,-20.412 35.188,-24.486 41.564,-30.861 45.466,-30.861 46.99,-32.385 ; *_DriverMotor3.15@37.284,-18.323 37.284,-18.28 *_DriverMotor3.15@41.828,-13.736 ; 45.72,-30.861 46.637,-31.778 BL1_DriverMotor3.5@46.815,-31.6
MW3_DriverMotor4: *_DriverMotor4.15 BL1_DriverMotor4.5 BL1_DriverMotor4.6 | length 26.5
  Top Layer w1: BL1_DriverMotor4.5@49.766,20.206 BL1_DriverMotor4.5@49.768,20.208 ; 49.962,20.091 49.883,20.038 49.88,20.036 43.935,16.04 43.739,15.843 43.739,7.595 46.574,4.474 51.118,-0.07 *_DriverMotor4.15@51.161,-0.07
Net*_DriverMotor1_1: *_DriverMotor1.1 R37_DriverMotor1.1 | length 83.2
  Top Layer w0.4: *_DriverMotor1.1@-34.524,31.704 -33.36,32.868 -29.464,32.868 -23.622,27.026 -18.136,27.026 -15.443,24.333 -15.443,15.494 -21.184,9.754 -21.184,-2.692 -18.644,-5.232 v1@-18.644,-15.138
  Top Layer w1: *_DriverMotor1.1@-39.241,26.987 *_DriverMotor1.1@-34.524,31.704
  Bottom Layer w0.6: v1@-25.639,-22.716 -25.639,-21.956 v1(-18.821,-15.138) v1@-18.644,-15.138
  other v1: -25.639,-22.716
Net*_DriverMotor2_1: *_DriverMotor2.1 R37_DriverMotor2.1 | length 20.8
  Top Layer w0.6: R37_DriverMotor2.1@-25.664,-24.799 -25.664,-25.517 -24.79,-26.391 -19.583,-26.391 -18.771,-25.578 -14.595,-25.578 *_DriverMotor2.1@-13.297,-26.875
  Top Layer w1: *_DriverMotor2.1@-13.297,-26.875 *_DriverMotor2.1@-8.728,-31.445
Net*_DriverMotor3_1: *_DriverMotor3.1 R37_DriverMotor3.1 | length 61.5
  Top Layer w0.6: v1@24.905,3.365 28.905,-0.635 28.905,-5.283 27.584,-6.604 v1@27.584,-27.305 ; v1@27.305,-27.305 v1(27.508,-27.305)
  Bottom Layer w0.6: v1(24.943,3.48) 27.584,3.48 v1(28.981,4.877) ; v1@27.61,-27.356 30.124,-29.87 v1@30.124,-43.292
  Bottom Layer w1: v1(25.324,-48.092) v1@30.124,-43.292
  other v1: 29.972,-43.536
Net*_DriverMotor4_1: *_DriverMotor4.1 R37_DriverMotor4.1 | length 17.5
  Top Layer w0.6: *_DriverMotor4.1@21.374,11.864 21.374,9.236 R37_DriverMotor4.1@27.288,3.323
  Top Layer w1: *_DriverMotor4.1@16.805,16.433 *_DriverMotor4.1@21.374,11.864
NetBattery1_1: Battery1.1 S6.3 | length 77.7
  Top Layer w2: S6.3@15.816,-45.947 22.726,-52.857 25.4,-52.857 29.159,-56.617 32.642,-56.617 68.682,-20.577 68.682,-16.529 Battery1.1@67.643,-15.491
NetBattery1_2: Battery1.2 Battery2.1 | length 10.8
  Top Layer w2: Battery2.1@61.09,-22.12 64.843,-18.367 Battery1.2@64.843,-18.291
  Bottom Layer w2: Battery2.1@61.09,-22.12 64.843,-18.367 Battery1.2@64.843,-18.291
NetC7_2: C7.2 FB1.2 J1.1 | length 33.8
  Top Layer w0.6: v1(-12.04,19.289) -12.04,20.091 -11.115,21.016 FB1.2@-8.407,21.016
  Bottom Layer w0.3: J1.1@-33.731,25.895 -33.731,28.067 -33.122,28.677 -25.552,28.677 -18.796,21.92 -13.564,21.92 -11.862,20.218 -11.862,19.355 -11.796,19.289 v1(-12.04,19.289)
  other v1: -8.357,21.133
NetC22_2: C22.2 U8.20 | length 6.2
  Bottom Layer w0.2: U8.20@20.327,9.08 19.722,9.08 19.431,8.788 19.431,8.035 21.582,5.884 C22.2@23.002,5.884
NetC24_2: C24.2 U8.10 | length 2.6
  Bottom Layer w0.2: U8.10@24.377,9.58 26.258,9.58 C24.2@26.753,9.085
NetD1_DriverMotor1_1: D1_DriverMotor1.1 R18_DriverMotor1.2 | length 3.2
  Top Layer w0.6: R18_DriverMotor1.2@-60.061,9.609 -59.258,10.412 -59.258,11.58 D1_DriverMotor1.1@-59.886,12.207
NetD1_DriverMotor2_1: D1_DriverMotor2.1 R18_DriverMotor2.2 | length 2.2
  Top Layer w0.6: R18_DriverMotor2.2@-37.962,-44.106 -37.883,-44.106 D1_DriverMotor2.1@-36.41,-42.633
NetD1_DriverMotor3_1: D1_DriverMotor3.1 R18_DriverMotor3.2 | length 2.1
  Top Layer w0.6: R18_DriverMotor3.2@36.133,-42.633 36.133,-43.016 D1_DriverMotor3.1@37.377,-44.261
NetD1_DriverMotor4_1: D1_DriverMotor4.1 R18_DriverMotor4.2 | length 2.5
  Top Layer w0.6: D1_DriverMotor4.1@58.115,11.404 R18_DriverMotor4.2@60.259,12.604
NetD2_1: D2.1 R19.1 | length 2.1
  Bottom Layer w0.6: R19.1@-35.093,18.567 -33.03,18.567 D2.1@-33.005,18.542
NetD2_2: D2.2 U4.23 | length 3.8
  Bottom Layer w0.3: D2.2@-31.105,18.542 -31.064,18.501 U4.23@-27.328,18.501
NetD3_1: D3.1 R20.1 | length 2.1
  Bottom Layer w0.6: R20.1@-35.067,16.561 D3.1@-32.979,16.561
NetD3_2: D3.2 U4.22 | length 4.3
  Bottom Layer w0.2: D3.2@-31.079,16.561 -29.789,17.851 U4.22@-27.328,17.851
NetD4_Led1_1: D4_Led1.1 R25_Led1.1 | length 2.2
  Top Layer w0.6: R25_Led1.1@14.569,31.521 D4_Led1.1@14.569,33.68
NetD4_Led1_2: D4_Led1.2 Q3_Led1.1 | length 2.3
  Bottom Layer w0.6: Q3_Led1.1@15.626,31.769 16.485,32.628 v1(16.485,33.731)
NetD4_Led2_1: D4_Led2.1 R25_Led2.1 | length 2.2
  Top Layer w0.6: R25_Led2.1@9.693,31.191 R25_Led2.1@9.718,31.166 ; R25_Led2.1@9.693,31.547 D4_Led2.1@9.693,33.68
NetD4_Led2_2: D4_Led2.2 Q3_Led2.1 | length 2.3
  Bottom Layer w0.6: Q3_Led2.1@10.698,31.769 11.557,32.628 v1(11.557,33.757)
NetD4_Led3_1: D4_Led3.1 R25_Led3.1 | length 2.2
  Top Layer w0.6: R25_Led3.1@4.968,31.521 D4_Led3.1@4.968,33.68
NetD4_Led3_2: D4_Led3.2 Q3_Led3.1 | length 2.3
  Bottom Layer w0.6: Q3_Led3.1@5.898,31.769 6.858,32.729 v1(6.858,33.68)
NetD5_2: D5.2 R26.2 | length 2.1
  Top Layer w0.6: R26.2@7.696,-61.783 7.696,-63.744 D5.2@7.722,-63.769 ; D5.2@7.722,-64.064 7.722,-64.038 D5.2@7.767,-64.084
NetD6_2: D6.2 L1.1 U6.2 | length 16.1
  Top Layer w0.6: U6.2@1.7,-35.712 1.7,-37.362 v1@7.747,-43.409
  Bottom Layer w0.6: U6.2@1.7,-35.712 1.7,-32.182 L1.1@3.353,-30.529
  other v1: 7.849,-43.326
NetD7_1: D7.1 R29.1 | length 5.7
  Top Layer w0.6: R29.1@-10.998,-61.173 -10.998,-64.364 -9.855,-65.507 D7.1@-9.002,-65.507
NetF2_2: F2.2 S6.2 S7.3 | length 40.7
  Bottom Layer w2: F2.2@-7.48,-64.491 -10.158,-61.813 S7.3@-10.158,-51.604 -10.158,-50.29 -6.655,-46.787 10.999,-46.787 S6.2@12.987,-48.775
NetJumper1_1: Jumper1.1 Q1.1 | length 11.5
  Top Layer w0.5: v1(55.651,-12.294) 54.788,-11.43 54.788,-4.826 55.651,-3.962 Jumper1.1@55.651,-1.524
NetJumper1_2: Jumper1.2 LS1.1 | length 6.1
  Top Layer w0.6: LS1.1@52.426,-8.865 52.426,-4.75 Jumper1.2@53.855,-3.32
NetLS1_2: LS1.2 R2.2 | length 3.1
  Bottom Layer w0.6: R2.2@50.531,-14.199 50.531,-14.59 LS1.2@52.426,-16.485
NetP1_1: P1.1 U3.89 | length 33
  Top Layer w0.2: U3.89@0.5,-7.55 0.5,-9.923 v1(0.838,-10.262)
  Top Layer w0.6: v1(13.462,-20.041) P1.1@17.406,-16.096
  Bottom Layer w0.5: v1(0.838,-10.262) 0.889,-10.312 0.889,-20.676 2.438,-22.225 11.481,-22.225 v1(13.462,-20.041)
NetP1_5: P1.5 R16.2 Reset1.2 U3.90 | length 49.8
  Top Layer w0.2: Reset1.2@-0.737,-15.367 1.829,-12.802 1.829,-9.627 1.05,-8.848 1.05,-7.6 U3.90@1,-7.55
  Bottom Layer w0.5: Reset1.2@-0.737,-15.367 -0.737,-21.463 0.864,-23.063 19.533,-23.063 24.359,-18.237 R16.2@24.359,-16.485 ; P1.5@21.058,-12.462 23.932,-15.337 R16.2@23.932,-16.28
NetP2_IR1_2: P2_IR1.2 R22_IR1.2 VR1_IR1.1 | length 13.6
  Top Layer w0.6: v1(-5.918,30.607) -4.572,29.261 VR1_IR1.1@-4.572,26.314
  Bottom Layer w0.6: R22_IR1.2@-5.928,30.632 -6.629,31.333 -6.629,33.757 -6.115,34.271 -3.334,34.271 -2.184,33.122 P2_IR1.2@-2.184,32.893
NetP2_IR1_3: P2_IR1.3 R34_IR1.2 | length 3.1
  Bottom Layer w0.6: P2_IR1.3@0.356,32.944 1.016,32.944 1.6,32.36 R34_IR1.2@1.6,30.744
NetP2_IR2_2: P2_IR2.2 R22_IR2.2 VR1_IR2.1 | length 16.3
  Bottom Layer w0.6: VR1_IR2.1@-14.859,26.365 -16.637,26.365 -17.247,26.975 -17.247,29.693 -16.281,30.658 R22_IR2.2@-15.682,30.658 -16.866,31.841 -16.866,33.452 -16.046,34.271 -13.469,34.271 P2_IR2.2@-12.065,32.868
NetP2_IR2_3: P2_IR2.3 R34_IR2.2 | length 3.2
  Bottom Layer w0.6: P2_IR2.3@-9.525,32.944 -8.788,32.944 -8.179,32.334 R34_IR2.2@-8.179,30.693
NetQ1_2: Q1.2 R1.2 | length 3.7
  Bottom Layer w0.6: R1.2@50.429,-10.998 52.802,-13.371 Q1.2@53.182,-13.371
NetQ2_IR1_2: Q2_IR1.2 R22_IR1.1 | length 1.9
  Bottom Layer w0.6: R22_IR1.1@-4.028,30.632 -3.794,30.866 Q2_IR1.2@-2.22,30.866
NetQ2_IR2_2: Q2_IR2.2 R22_IR2.1 | length 1.9
  Bottom Layer w0.6: R22_IR2.1@-13.782,30.658 -13.573,30.866 Q2_IR2.2@-11.974,30.866
NetQ3_Led1_2: Q3_Led1.2 R24_Led1.2 | length 1.8
  Bottom Layer w0.6: R24_Led1.2@16.576,27.116 Q3_Led1.2@16.576,28.914
NetQ3_Led2_2: Q3_Led2.2 R24_Led2.2 | length 1.8
  Bottom Layer w0.6: R24_Led2.2@11.648,27.116 Q3_Led2.2@11.648,28.914
NetQ3_Led3_2: Q3_Led3.2 R24_Led3.2 | length 1.8
  Bottom Layer w0.6: R24_Led3.2@6.848,27.116 Q3_Led3.2@6.848,28.914
NetR21_1: R21.1 U4.12 | length 12.2
  Top Layer w0.4: v4(-17.424,11.76) -17.424,12.522 -14.376,15.57 v1(-14.376,17.465)
  Bottom Layer w0.4: U4.12@-20.678,14.601 -18.944,14.601 -17.424,13.081 v4(-17.424,11.76)
NetR32_1: R32.1 R33.2 U8.9 | length 5.1
  Bottom Layer w0.2: U8.9@24.377,10.08 25.513,10.08 R33.2@26.753,11.32
  Bottom Layer w0.6: R33.2@26.753,11.32 R32.1@26.753,13.555
PORTA2: C9.1 R29.2 R35.2 S8.1 U3.97 | length 94.5
  Top Layer w0.2: v1(2.997,-4.547) 4.5,-6.049 U3.97@4.5,-7.55
  Top Layer w0.5: R29.2@-10.998,-59.273 R35.2@-8.23,-59.273
  Top Layer w0.6: R35.2@-8.23,-59.273 -7.178,-59.273 -5.607,-57.703 S8.1@-5.607,-57.555 -7.645,-55.517 v1(-7.645,-45.187)
  Bottom Layer w0.2: -6.477,-4.547 -3.708,-4.547 -1.245,-2.083 0.533,-2.083 v1(2.997,-4.547)
  Bottom Layer w0.5: v1@-7.772,-45.136 -7.772,-25.984 -14.859,-18.898 -14.859,-10.77 -8.636,-4.547 -6.477,-4.547 ; S8.1@-5.607,-57.073 -4.795,-56.261 0.406,-56.261 1.72,-57.574 C9.1@2.278,-57.574
  Bottom Layer w0.6: C9.1@2.591,-57.262 2.884,-57.555 S8.1@5.393,-57.555
PORTA3: R27.1 R28.2 U3.98 | length 21.7
  Top Layer w0.2: U3.98@5,-7.55 5.05,-7.6 5.05,-9.393 6.121,-10.465 6.121,-18.364 8.331,-20.574 v1(8.331,-25.832)
  Bottom Layer w0.6: R27.1@8.316,-27.838 8.341,-27.813 R28.2@8.341,-25.806
PORTB7: madarshoot1.1 U3.12 | length 76.3
  Top Layer w0.2: U3.12@7.55,-0.5 14.156,-0.5 15.367,0.711 v1(15.57,0.711)
  Top Layer w0.6: v1@34.265,6.02 34.265,3.302 36.805,0.762 v1(36.805,0.508)
  Bottom Layer w0.6: v1(15.57,0.711) 15.875,0.711 18.479,-1.892 18.479,-4.635 22.733,-8.89 30.963,-8.89 36.805,-3.048 v1(36.805,0.508) ; v1@34.214,6.426 34.823,7.036 60.96,7.036 ; 60.934,7.077 v1(62.137,7.84)
  other v1: 34.29,6.477
PORTC2: U3.17 | length 3.5
  Top Layer w0.2: U3.17@7.55,2 9.696,2 10.211,2.515 v3(10.846,2.515)
PORTC3: U3.18 | length 4.7
  Top Layer w0.2: U3.18@7.55,2.5 9.256,2.5 10.541,3.785 v3@11.684,3.785
  other v3: 11.786,3.861
PORTC4: U3.19 | length 5.8
  Top Layer w0.2: U3.19@7.55,3 8.994,3 11.303,5.309 v3@12.395,5.309
  other v3: 12.802,5.055
PORTD0: R31.2 U3.25 U8.24 | length 14.9
  Top Layer w0.2: U3.25@7.55,6 8.7,7.15 13.83,7.15 17.856,11.176 18.146,11.176 18.085,11.237 v1(18.085,11.43)
  Bottom Layer w0.2: R31.2@18.431,11.08 U8.24@20.327,11.08
PORTD1: R30.2 U3.26 U8.23 | length 16.3
  Top Layer w0.2: U3.26@6,7.55 6.476,8.026 8.725,8.026 9.119,7.632 v1(9.119,7.95)
  Bottom Layer w0.2: R30.2@18.146,8.636 18.146,9.003 19.722,10.58 U8.23@20.327,10.58
  Bottom Layer w0.6: v1(9.119,7.95) 17.46,7.95 R30.2@18.146,8.636
PORTD4: U3.29
PORTE2: U3.37 U4.1 usart1.3 | length 32.6
  Top Layer w0.2: v1(0.356,5.715) 0.5,5.859 U3.37@0.5,7.55
  Bottom Layer w0.4: U4.1@-20.678,21.751 -20.669,21.742 -19.533,21.742 -18.999,21.209 -13.767,21.209 -12.929,20.371 -12.929,19.673 -12.94,19.662 -12.94,15.454 -10.211,12.725 usart1.3@-9.779,12.294
  Bottom Layer w0.6: usart1.3@-9.779,12.294 -9.779,12.014 -6.82,9.055 -2.984,9.055 v1(0.356,5.715)
PORTE3: U3.38 U4.5 usart1.2 | length 28.7
  Top Layer w0.2: v1(-0.889,5.207) -0.864,5.207 v1@-0.686,5.029 ; v1@-0.686,5.359 -0.889,5.563 -0.889,5.766 0,6.655 U3.38@0,7.55
  Bottom Layer w0.4: U4.5@-20.678,19.151 -19.075,19.151 -12.954,13.03 -12.954,12.649 usart1.2@-12.751,12.446
  Bottom Layer w0.6: usart1.2@-12.751,12.446 -12.37,12.446 -8.179,8.255 -3.937,8.255 v1(-0.889,5.207)
PORTE7: U3.42 U7.5 | length 20.7
  Top Layer w0.2: U3.42@-2,7.55 -2,9.95 -4.216,12.167 -4.216,21.692 -3.15,22.758 -1.372,22.758 U7.5@0.305,21.082
PORTF0: R15.1 U3.45 | length 10.7
  Top Layer w0.2: -5.004,11.709 -5.004,10.389 -3.5,8.885 U3.45@-3.5,7.55
  Top Layer w0.6: v1(-6.248,17.16) -5.004,15.916 -5.004,11.709
PORTF1: R14.1 U3.46 | length 11.5
  Top Layer w0.2: v1@-8.763,17.145 v1@-8.407,16.789 ; -6.045,11.684 -6.045,10.77 -4,8.724 U3.46@-4,7.55
  Top Layer w0.6: v1@-8.23,16.84 -6.045,14.656 -6.045,11.684
  other v1: -8.407,17.16
PORTF2: Q5.1 R17.2 U3.47 | length 46.1
  Top Layer w0.2: U3.47@-4.5,7.55 -4.5,5.745 -2.362,3.607 v1@3.785,3.607
  Top Layer w0.6: v1(32.437,-0.074) 32.586,-0.074 32.741,-0.229 32.741,-0.298 R17.2@33.647,-1.204
  Bottom Layer w0.2: v1(3.81,3.581) 7.379,7.15 19.672,7.15 26.873,-0.051 32.511,-0.051 Q5.1@32.692,-0.232
PORTF3: *_DriverMotor1.2 *_DriverMotor2.2 *_DriverMotor3.2 *_DriverMotor4.2 U3.48 | length 208.4
  Top Layer w0.2: -7.163,11.201 -5,9.039 U3.48@-5,7.55
  Top Layer w0.4: *_DriverMotor1.2@-31.953,30.683 -28.27,30.683 -23.952,26.365 -18.618,26.365 -17.399,25.146 v1@-17.399,23.241 ; v1@-17.805,-17.272 v1(-17.628,-17.45) -19.533,-17.45 -20.244,-16.739 -20.244,-4.801 -21.971,-3.073 -21.971,10.16 -16.053,16.078 -16.053,21.488 v1@-17.602,23.038
  Top Layer w0.6: *_DriverMotor2.2@-10.872,-32.893 -5.055,-38.71 v1(-5.055,-39.726) ; v1(-9.677,15.011) -7.163,12.497 -7.163,11.201 ; v1(-3.937,-44.653) -3.962,-44.679 -3.962,-47.066 -2.108,-48.92 v1(-2.083,-48.92)
  Top Layer w1: *_DriverMotor1.2@-37.445,25.191 *_DriverMotor1.2@-31.953,30.683 ; v1(-15.093,-28.672) *_DriverMotor2.2@-10.872,-32.893 ; *_DriverMotor4.2@18.601,18.229 *_DriverMotor4.2@23.17,13.66
  Bottom Layer w0.4: v1@-17.17,22.987 -12.852,22.987 -10.998,21.133 -10.998,15.926 -10.084,15.011 v1(-9.677,15.011)
  Bottom Layer w0.6: v1(-17.628,-17.45) -14.935,-20.142 v1@-14.935,-28.804 ; v1(-9.677,15.011) -9.5,14.834 14.656,14.834 v1(18.39,18.567) ; v1(-5.055,-39.726) -5.055,-43.536 v1(-3.937,-44.653) ; v1@-2.083,-48.87 3.912,-48.87 9.957,-54.915 14.808,-54.915 v1(23.546,-46.177) ; v1@27.635,-42.088 v1@27.737,-42.088
  Bottom Layer w1: v1(23.546,-46.177) v1@27.635,-42.088
  other v1: 27.94,-41.783 -17.323,22.987
PORTF5: U3.50 | length 6.3
  Top Layer w0.2: v3(-10.947,9.093) -10.846,9.195 -6.604,9.195 -6,8.591 U3.50@-6,7.55
PORTF6: Q4.1 R36.2 U3.51 | length 53.2
  Top Layer w0.2: -13.868,10.465 -9.404,6 U3.51@-7.55,6
  Top Layer w0.4: v1@-17.628,-16.027 -17.628,-4.928 -20.371,-2.184 -20.371,8.712 -18.618,10.465 -13.868,10.465
  Bottom Layer w0.6: v1(-17.653,-16.027) -17.856,-16.231 -18.415,-16.231 -20.498,-18.313 -20.498,-23.136 Q4.1@-19.711,-23.923 -17.523,-23.923 v1(-17.511,-23.935)
PORTF7: U3.52
PORTH4: U3.59 | length 5.1
  Top Layer w0.2: v3@-10.439,4.902 -9.677,4.902 -8.966,4.191 -8.966,2.464 -8.502,2 U3.59@-7.55,2
  other v3: -10.49,4.851
PORTH5: U3.60 | length 4
  Top Layer w0.2: v3@-10.439,3.175 -9.784,3.175 -9.398,2.789 -9.398,2.134 -8.764,1.5 U3.60@-7.55,1.5
  other v3: -10.516,3.2
PORTH6: U3.61 | length 3.1
  Top Layer w0.2: v3@-10.414,1.6 -9.703,1.6 -9.103,1 U3.61@-7.55,1
  other v3: -10.516,1.626
PORTJ0: U2.9 U3.65 | length 12.2
  Top Layer w0.2: U2.9@-15.314,6.147 -14.224,6.147 -11.684,3.607 -11.684,1.016 -9.665,-1.003 -7.553,-1.003 U3.65@-7.55,-1
PORTJ1: U2.8 U3.66 | length 11.6
  Top Layer w0.203: U2.8@-15.314,4.877 -14.351,4.877 -12.116,2.642 -12.116,0.635 -9.981,-1.5 U3.66@-7.55,-1.5
PORTJ2: U2.7 U3.67 | length 10.8
  Top Layer w0.2: U2.7@-15.088,3.607 -14.3,3.607 -12.573,1.88 -12.573,0.356 -10.217,-2 U3.67@-7.55,-2
PORTJ3: U2.6 U3.68 | length 10.4
  Top Layer w0.2: U2.6@-15.314,2.337 -14.249,2.337 -12.979,1.067 -12.979,-0.076 -10.556,-2.5 U3.68@-7.55,-2.5
PORTJ4: U2.5 U3.69 | length 9.8
  Top Layer w0.2: U2.5@-15.314,1.067 -14.376,1.067 -13.411,0.102 -13.411,-0.533 -10.945,-3 U3.69@-7.55,-3
PORTJ5: U2.4 U3.70 | length 9.3
  Top Layer w0.2: U2.4@-15.466,-0.203 -14.554,-0.203 -11.257,-3.5 U3.70@-7.55,-3.5
PORTJ6: U2.3 U3.71 | length 9
  Top Layer w0.2: U2.3@-15.466,-1.473 -14.122,-1.473 -11.596,-4 U3.71@-7.55,-4
PORTJ7: U2.2 U3.72 | length 8.6
  Top Layer w0.2: U2.2@-15.466,-2.743 -13.691,-2.743 -11.934,-4.5 U3.72@-7.55,-4.5
PORTK0: U1.9 U3.75 | length 8.9
  Top Layer w0.2: U1.9@-15.567,-8.077 -10.414,-8.077 -8.337,-6 U3.75@-7.55,-6
PORTK1: U1.8 U3.76 | length 10.8
  Top Layer w0.2: U1.8@-15.567,-9.347 -6.934,-9.347 -6,-8.413 U3.76@-6,-7.55
PORTK2: U1.7 U3.77 | length 12
  Top Layer w0.2: U1.7@-15.567,-10.617 -7.442,-10.617 -5.5,-8.675 U3.77@-5.5,-7.55
PORTK3: U1.6 U3.78 | length 13.2
  Top Layer w0.2: U1.6@-15.567,-11.887 -15.414,-11.735 -7.798,-11.735 -5,-8.937 U3.78@-5,-7.55
PORTK4: U1.5 U3.79 | length 14.3
  Top Layer w0.2: U1.5@-15.567,-13.157 -8.484,-13.157 -4.5,-9.174 U3.79@-4.5,-7.55
PORTK5: U1.4 U3.80 | length 15.5
  Top Layer w0.2: U1.4@-15.567,-14.427 -9.068,-14.427 -4,-9.359 U3.80@-4,-7.55
PORTK6: U1.3 U3.81 | length 16.7
  Top Layer w0.2: U1.3@-15.567,-15.697 -9.55,-15.697 -3.5,-9.647 U3.81@-3.5,-7.55
PORTK7: U1.2 U3.82 | length 17.9
  Top Layer w0.2: U1.2@-15.567,-16.967 -10.033,-16.967 -3,-9.934 U3.82@-3,-7.55
PORTQ0: U3.85 | length 9
  Top Layer w0.2: v3@-3.658,-15.189 -3.658,-14.884 -4.166,-14.376 -4.166,-12.7 -1.5,-10.034 U3.85@-1.5,-7.55
  other v3: -4.039,-14.783
PORTQ1: U3.86 | length 7.3
  Top Layer w0.2: v3(-2.845,-13.64) -2.87,-13.64 -3.023,-13.487 -2.845,-13.487 -3.048,-13.284 -3.048,-12.446 -1,-10.398 U3.86@-1,-7.55
PORTQ2: U3.87 | length 5.2
  Top Layer w0.2: v3@-1.6,-12.116 -1.295,-12.116 -0.5,-11.32 U3.87@-0.5,-7.55
  other v3: -1.651,-12.522
PORTQ3: U3.88 | length 6
  Top Layer w0.2: v3(-0.381,-13.437) 0,-13.056 U3.88@0,-7.55
TWI_CLK_DriverMotor1: *_DriverMotor1.3 | length 21.2
  Top Layer w0.4: *_DriverMotor1.3@-31.079,27.964 -29.554,29.489 -28.118,29.489 -24.105,25.476 -20.066,25.476 v1(-19.837,25.248)
  Top Layer w0.6: *_DriverMotor1.3@-31.079,28.371 -30.913,28.371 *_DriverMotor1.3@-30.251,29.032
  Top Layer w1: *_DriverMotor1.3@-35.649,23.395 *_DriverMotor1.3@-31.079,27.964
TWI_CLK_DriverMotor2: *_DriverMotor2.3 | length 10.1
  Top Layer w0.6: *_DriverMotor2.3@-12.447,-34.935 *_DriverMotor2.3@-12.447,-34.91 ; *_DriverMotor2.3@-12.333,-35.05 -9.663,-37.719 v1(-9.627,-37.719)
  Top Layer w1: *_DriverMotor2.3@-16.889,-30.468 *_DriverMotor2.3@-12.447,-34.91
TWI_CLK_DriverMotor3: *_DriverMotor3.3 | length 15.6
  Bottom Layer w0.6: v1@12.903,-43.002 18.567,-43.002 20.015,-44.45 v1(21.768,-44.45) ; v1@26.06,-40.157 v1(26.06,-40.132)
  Bottom Layer w1: v1(21.768,-44.45) v1@26.06,-40.157
  other v1: 12.903,-43.155
TWI_CLK_DriverMotor4: *_DriverMotor4.3 | length 10.7
  Top Layer w0.6: v1(17.45,23.038) 20.397,20.09 *_DriverMotor4.3@20.397,20.026
  Top Layer w1: *_DriverMotor4.3@20.397,20.026 *_DriverMotor4.3@24.967,15.456
TWI_DATA_DriverMotor1: *_DriverMotor1.4 | length 16
  Top Layer w0.4: *_DriverMotor1.4@-29.283,26.168 -27.949,27.503 -27.046,27.503 -23.952,24.409 v1@-23.089,24.409
  Top Layer w0.6: *_DriverMotor1.4@-29.283,26.575 *_DriverMotor1.4@-28.248,27.61
  Top Layer w1: *_DriverMotor1.4@-33.853,21.599 *_DriverMotor1.4@-29.283,26.168
  other v1: -23.089,24.511
TWI_DATA_DriverMotor2: *_DriverMotor2.4 | length 10.1
  Top Layer w0.6: *_DriverMotor2.4@-14.243,-36.706 -14.243,-36.735 v1(-11.557,-39.421)
  Top Layer w1: *_DriverMotor2.4@-18.685,-32.264 *_DriverMotor2.4@-14.243,-36.706